# EAGLE board ssChildSignalTower (EAGLE 8.2.2)
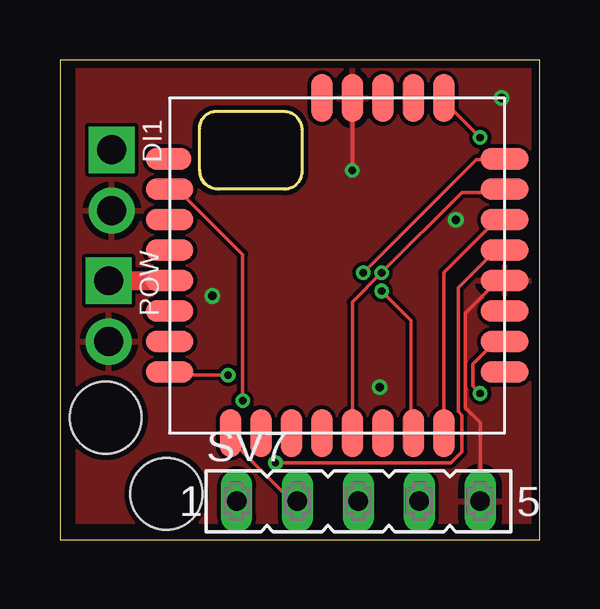
[diagram p0: board, top side]
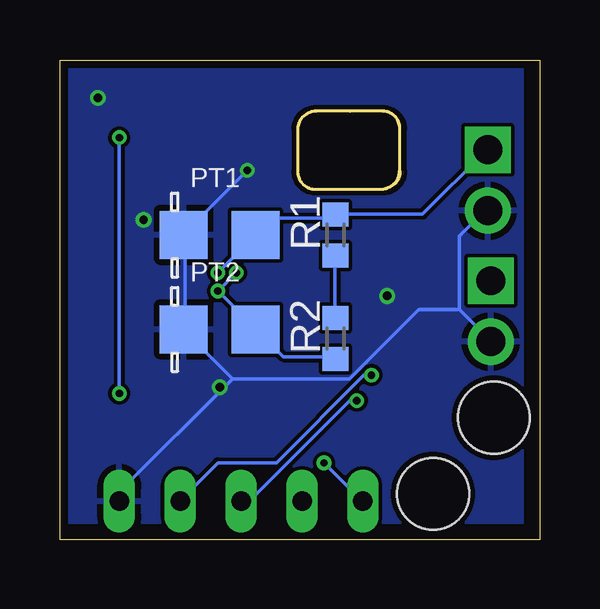
[diagram p1: board, bottom side, seen from below]

Size 20 x 20 mm. Coordinates in mm from the lower left corner, seen from the top.
Outline: 0,0 20,0 20,20 0,20 0,0
Copper layers (1*16): Top 0.035mm / dielectric 1.5mm / Bottom 0.035mm
Design rules "SeeedStudio_2layer_DRU_no_angle_20140221": minimum track width 6mil, minimum drill 12mil, track to track 6mil, track to pad 6mil, pad to pad 6mil, via to via 6mil, smd to smd 0mil, copper to edge 10mil, drill to drill 10mil, minimum pad ring 10mil, minimum via ring 6mil, stop-mask expansion 2mil, vias tented up to drill 100mil, thermal gap 10mil
Holes 3 mm at 1.91,5.08 4.45,1.91
tRestrict: area 0,0 to 0.6,19.7; area 0.6,0 to 19.7,0.6; area 19.7,0 to 20.3,20.3; area 0,19.7 to 20.3,20.3
bRestrict: area 0,0 to 0.6,19.7; area 0.6,0 to 19.7,0.6; area 19.7,0 to 20.3,20.3; area 0,19.7 to 20.3,20.3
vRestrict: area 12.7,7.5 to 14,10; area 12.7,11.4 to 14,14

## Footprints (pad centres in the part's own frame; a part is rotated, then mirrored left to right if it is on the bottom)
AMON0.5SQ_WIRE_HOLE = drill 1.2 pad 1.93 square: 1 -1.27,0 | drill 1.2 pad 1.93: 2 1.27,0
GL-01674-PS1101W-PHOTO-TRANSISTOR = smd 2 x 2: C 0,1.5; E 0,-1.5
R0603 = smd 1 x 1.1: 1 -0.85,0; 2 0.85,0
FE05-1 = drill 0.813 long: 1 -5.08,0; 2 -2.54,0; 3 0,0; 4 2.54,0; 5 5.08,0
LITE = smd 1.9 x 0.9: P$1 -0.05,11.43 | smd 2 x 0.9: P$2 0,10.16; P$3 0,8.89; P$4 0,7.62; P$5 0,6.35; P$6 0,5.08; P$7 0,3.81; P$8 0,2.54; P$17 13.97,2.54; P$18 13.97,3.81; P$19 13.97,5.08; P$20 13.97,6.35; P$21 13.97,7.62; P$22 13.97,8.89; P$23 13.97,10.16; P$24 13.97,11.43 | smd 0.9 x 2: P$9 2.54,0; P$10 3.81,0; P$11 5.08,0; P$12 6.35,0; P$13 7.62,0; P$14 8.89,0; P$15 10.16,0; P$16 11.43,0; P$25 11.43,13.97; P$26 10.16,13.97; P$27 8.89,13.97; P$28 7.62,13.97; P$29 6.35,13.97

## Placement (x,y rotation side)
DI1  AMON0.5SQ_WIRE_HOLE  [AMON0.5SQ_WIRE_HOLE]  2.16,14.99 270 top
POW  AMON0.5SQ_WIRE_HOLE  [AMON0.5SQ_WIRE_HOLE]  2.03,9.53 270 top
PT1  PS1101W  [GL-01674-PS1101W-PHOTO-TRANSISTOR]  13.34,12.7 270 bottom
PT2  PS1101W  [GL-01674-PS1101W-PHOTO-TRANSISTOR]  13.34,8.76 270 bottom
R1  1M  [R0603]  8.51,12.7 90 bottom
R2  1M  [R0603]  8.51,8.38 90 bottom
SV7  [FE05-1]  12.45,1.6 0 top
U$1  LITE  [LITE]  4.57,4.45 0 top

## Library data of the parts
DI1 POW PT1 PT2 = Akizuki
R1 R2 = rcl
SV7 = con-lsta; OC_FARNELL: unknown; OC_NEWARK: unknown
U$1 = TWELite

## Nets
+3V3: POW.1 U$1.P$5
+UB: R1.1 R2.2
A1: DI1.1 PT1.C R1.2 U$1.P$13 U$1.P$23
A2: PT2.C R2.1 U$1.P$15 U$1.P$24
A3: U$1.P$16 U$1.P$22
A4: U$1.P$18 U$1.P$25
DO1: U$1.P$3
DO2: U$1.P$4
GND: DI1.2 POW.2 PT1.E PT2.E SV7.5 U$1.P$20 U$1.P$28
SCL: U$1.P$14
SDA: U$1.P$17
TWE.PRG: SV7.3 U$1.P$2
TWE.RST: SV7.1 U$1.P$21
TWE.RX: SV7.2 U$1.P$9
TWE.TX: SV7.4 U$1.P$8

## Tracks (layer width: path | path; a pad name or v marks a point on that pad's centre or on a via)
+3V3
  Top 0.8: POW.1 U$1.P$5
+UB
  Bottom 0.152: R2.2 8.53,9.3 8.53,11.73 R1.1
A1  (via drill 0.3)
  Top 0.152: U$1.P$13 12.19,9.91 v13.41,11.12 16.76,14.48 18.44,14.48 U$1.P$23
  Bottom 0.152: DI1.1 2.29,16.15 4.88,13.56 8.38,13.56 R1.2 8.53,13.41 11.12,13.41 11.73,12.8 PT1.C 11.89,12.65 v13.41,11.12
A2  (via drill 0.3)
  Top 0.152: v13.41,10.36 14.63,9.14 14.63,4.57 U$1.P$15 | v12.65,11.12 17.37,15.85 18.44,15.85 U$1.P$24
  Bottom 0.152: R2.1 8.53,7.62 10.67,7.62 11.73,8.69 PT2.C 11.89,8.84 v13.41,10.36 v12.65,11.12
A3
  Top 0.152: U$1.P$16 16,11.12 18.14,13.26 18.44,13.26 U$1.P$22
A4  (via drill 0.3)
  Top 0.152: v17.53,6.1 17.22,6.4 17.22,7.32 18.14,8.23 18.44,8.23 U$1.P$18 | v17.53,16.76 16,18.29 U$1.P$25
  Bottom 0.152: v17.53,16.76 v17.53,6.1
GND  (via drill 0.3, 0.35)
  Top 0.152: SV7.5 17.53,4.88 16.92,5.49 16.92,9.45 18.14,10.67 18.44,10.67 U$1.P$20 | v12.19,15.39 U$1.P$28
  Bottom 0.152: 3.35,9.6 2.13,8.38 POW.2 | 3.35,9.6 3.35,12.65 2.29,13.72 DI1.2 | v12.19,15.39 14.78,12.8 PT1.E 14.78,12.65 14.78,8.84 PT2.E 14.78,8.69 12.8,6.71 | 3.35,9.6 5.03,9.6 7.92,6.71 12.8,6.71 | SV7.5 17.53,1.98 12.8,6.71
  other vias: 18.41,18.41 6.35,10.16 13.34,6.35 16.51,13.34
  pour Bottom: 0.64,19.68 19.68,19.68 19.68,0.64 0.64,0.64
  pour Top: 0.64,19.68 19.68,19.68 19.68,0.64 0.64,0.64
TWE.PRG  (via drill 0.3)
  Top 0.152: v7.62,5.79 7.62,11.89 5.03,14.48 4.57,14.48 U$1.P$2
  Bottom 0.152: v7.62,5.79 7.92,5.79 12.04,1.68 12.34,1.68 SV7.3
TWE.RST  (via drill 0.3)
  Top 0.152: v8.99,3.2 16.31,3.2 16.76,3.66 16.76,5.18 16.61,5.33 16.61,10.52 18.14,12.04 18.44,12.04 U$1.P$21
  Bottom 0.152: v8.99,3.2 7.47,1.68 SV7.1
TWE.RX
  Top 0.152: U$1.P$9 7.16,4.42 7.16,4.12 9.6,1.68 9.91,1.68 SV7.2
TWE.TX  (via drill 0.3)
  Top 0.152: v7.01,6.86 4.57,6.86 U$1.P$8
  Bottom 0.152: v7.01,6.86 7.32,6.86 10.97,3.2 13.41,3.2 14.94,1.68 SV7.4